# Altium PCB PCB1.PcbDoc
Units mm, origin at the board's own origin, x right, y up, seen from the top; angles counter-clockwise.
Board outline 48.01 x 41.4 mm, 2 copper layers (Top Layer, Bottom Layer); 19 components, 31 nets, 88 pads, 2 vias.
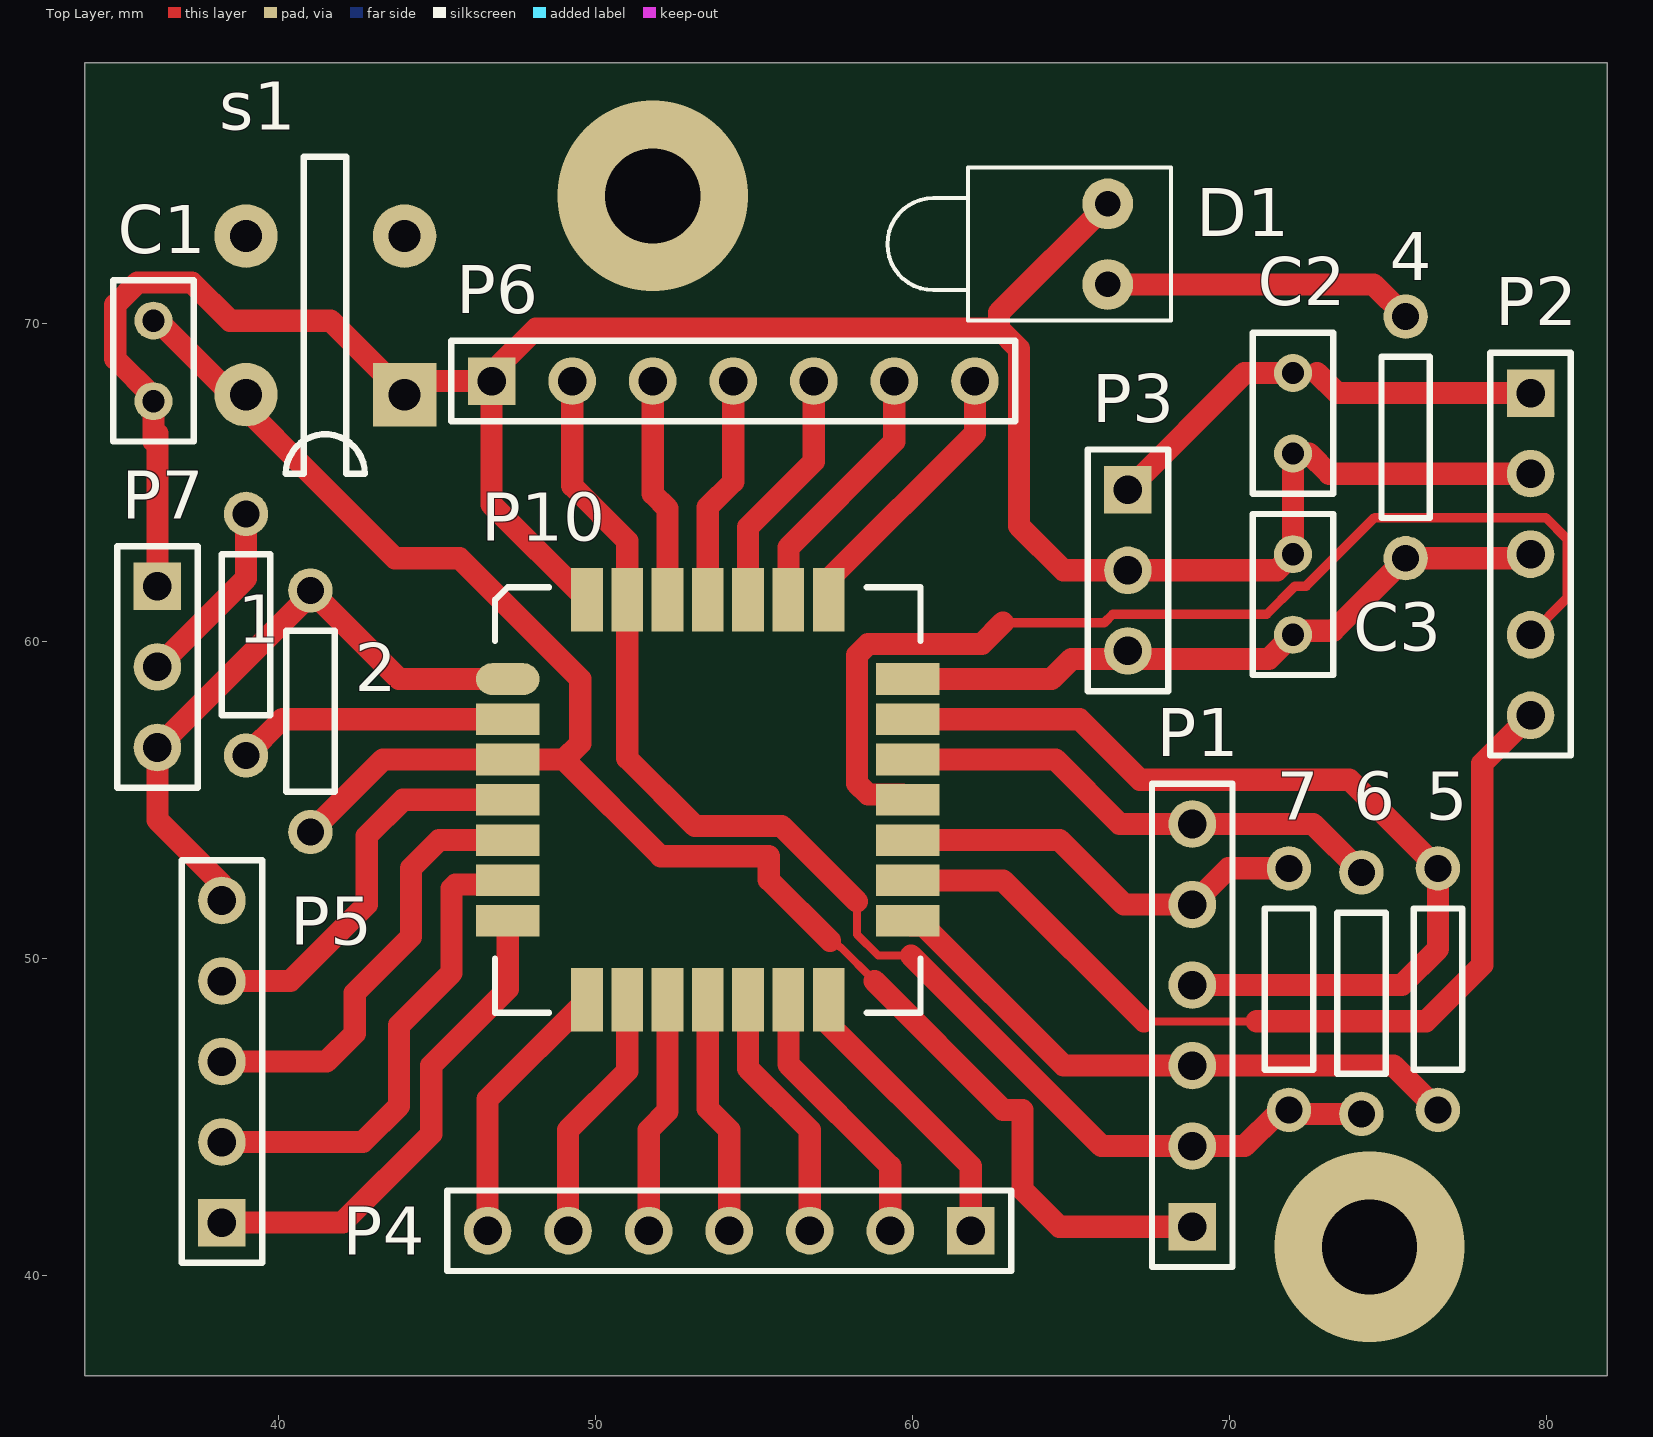
[diagram p0: Top Layer view]
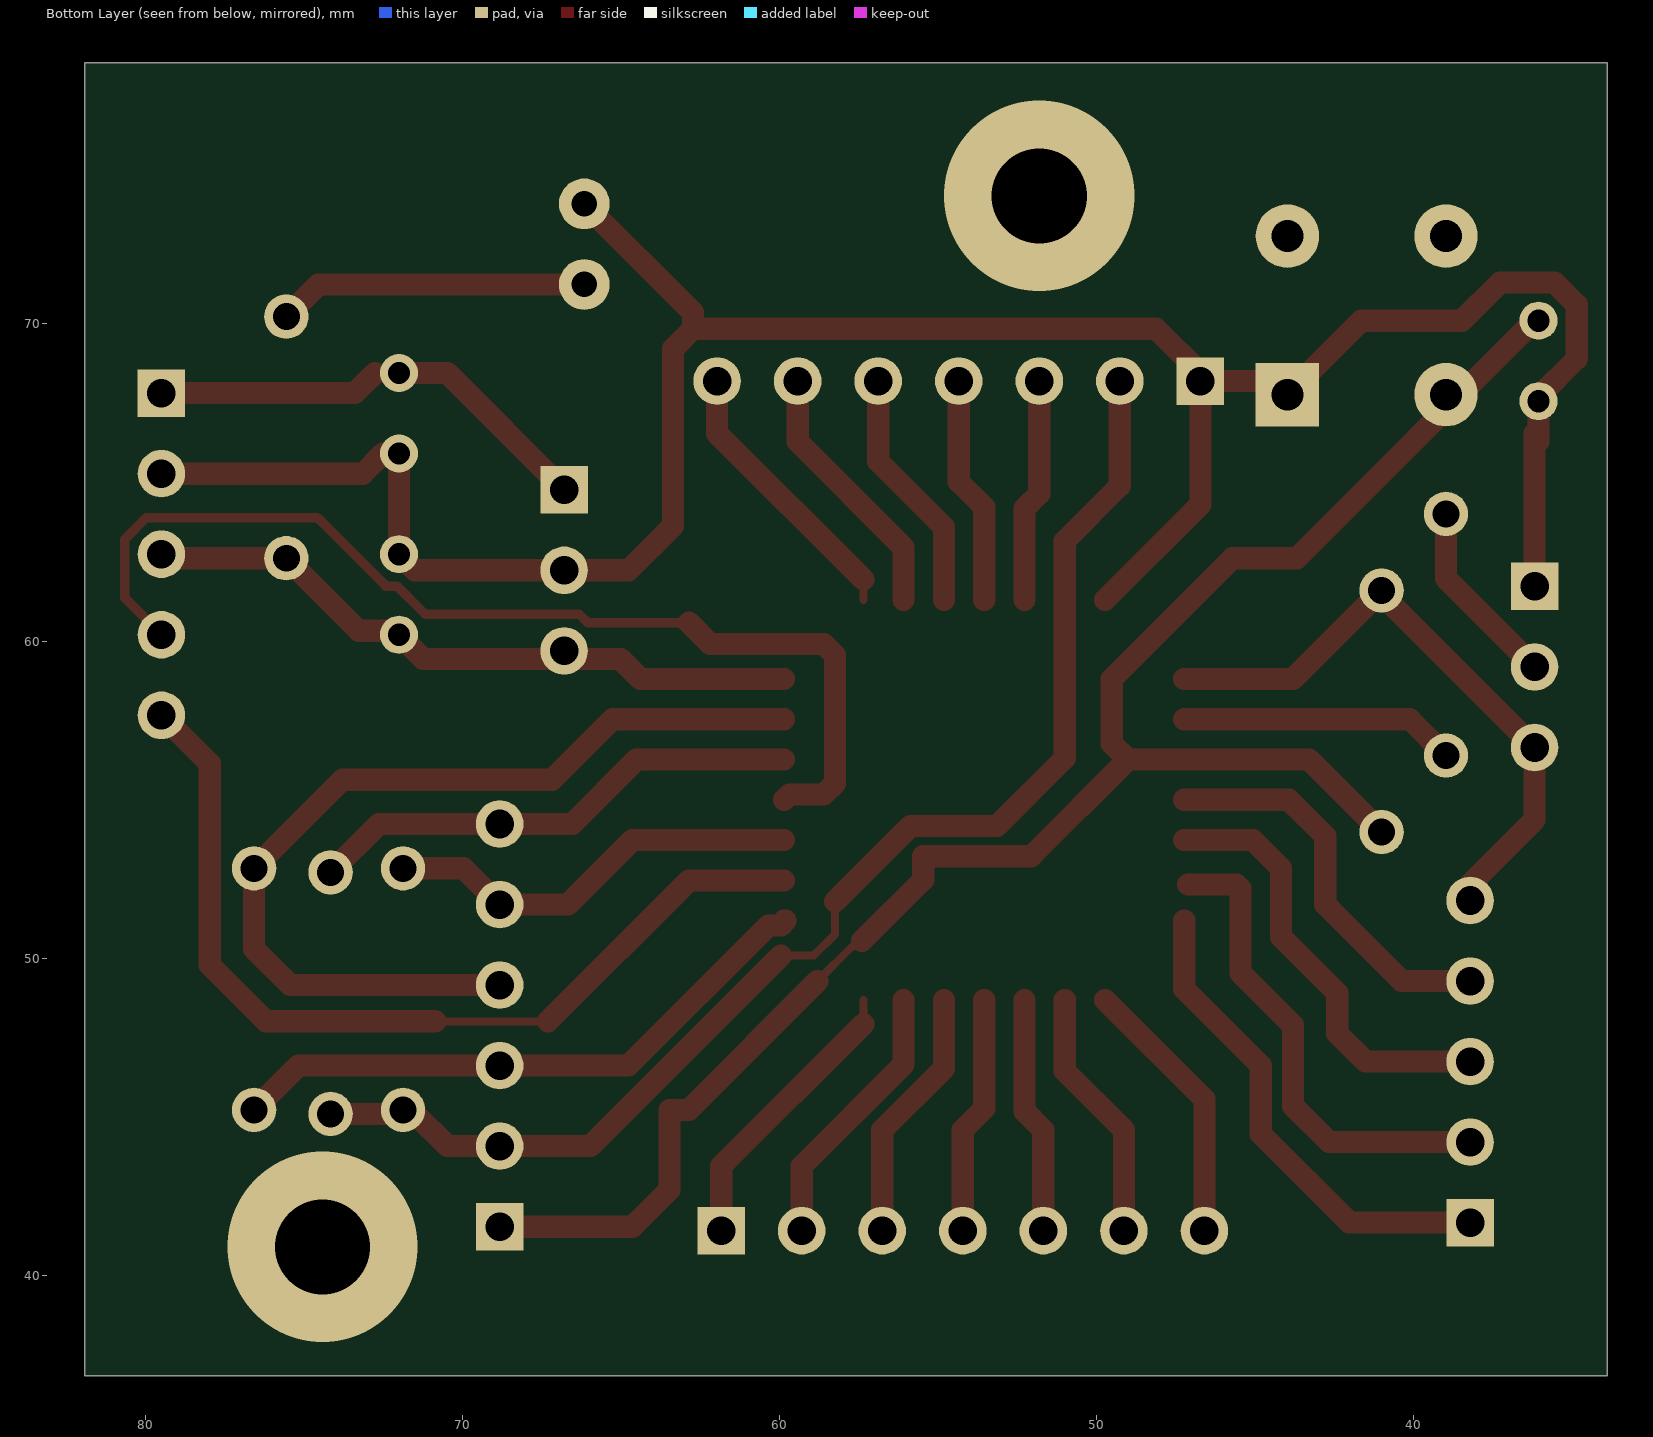
[diagram p1: Bottom Layer view, seen from below]

## Layer stack, top to bottom
Top Solder: solder mask 0.0102, Solder Resist, Dk 3.5
Top Layer: signal copper 0.0356
Dielectric 1: dielectric 0.32, FR-4, Dk 4.8
Bottom Layer: signal copper 0.0356
Bottom Solder: solder mask 0.0102, Solder Resist, Dk 3.5

## Board outline
33.909,36.83 81.915,36.83 81.915,78.232 33.909,78.232

## Design rules (kind name [scope] priority, off if disabled: settings)
Clearance [All] p1: gap=0.254
HoleSize [All] p1: absolutevalues=TRUE maxlimit=3.1 minlimit=0.025 maxpercent=80.000 minpercent=20.000
PolygonConnect [All] p1: connectstyle=Relief reliefconductorwidth=0.254 reliefentries=4 polygonreliefangle="90 Angle" airgapwidth=0.254
RoutingVias [All] p1: holewidth=0.711 width=1.27 viastyle="Through Hole" minholewidth=0.711 minwidth=1.27 maxholewidth=0.711 maxwidth=1.27
SolderMaskExpansion [All] p1: expansion=0.102
Width [All] p1: maxlimit=0.7 minlimit=0.254 preferedwidth=0.7
28 further rules are at their usual default settings.

## Components (designator, comment, footprint, x,y, rotation, side; value= is the part's Value field where it differs from the comment)
1 "Boot" AXIAL-0.3 38.989,60.198 r90 top
2 "switch" AXIAL-0.3 41.021,57.785 r90 top
4 "LED" AXIAL-0.3 75.565,66.421 r270 top
5 "pulldown" AXIAL-0.3 76.581,49.022 r270 top
6 "pullup" AXIAL-0.3 74.168,48.895 r90 top
7 "pullup" AXIAL-0.3 71.882,49.022 r270 top
C1 "Cap" RAD-0.1 36.068,68.834 r90 top
C2 "Cap" RAD-0.1 72.009,67.183 r270 top
C3 "Cap" RAD-0.1 72.009,61.468 r90 top
D1 "LED1" LED-1 66.167,72.517 r180 top
P1 "SWD" HDR1X6 68.834,41.529 r90 top
P2 "OUT3" HDR1X5 79.502,67.818 r270 top
P3 "powerRegulator" HDR1X3 66.802,64.77 r270 top
P4 "OUT2" HDR1X7 61.849,41.402 r180 top
P5 "OUT1" HDR1X5 38.227,41.656 r90 top
P6 "OUT4" HDR1X7 46.736,68.199 r0 top
P7 "BOOT" HDR1X3 36.195,61.722 r270 top
P10 "Component_1" "INEMO - duplicate3" 47.244,58.801 r0 top
s1 "Component_1" swt 46.101,70.739 r180 top

## Footprints (in the part's own frame and the unit in brackets; to place one, negate y for a bottom-side part, rotate by r counter-clockwise, add the part's x,y. Pads: shape width x height; smd on the part's side, far side on the other; paste and mask are expansions set on the pad)
AXIAL-0.3 [mm] "Axial Device, Thru-Hole; 2 Leads; 0.3 in Pin Spacing"
  round 1.4 hole 0.85: 1(-3.81,0) 2(3.81,0)
  silkscreen extent -2.54,-0.76 2.54,0.76
HDR1X3 [mm] "Connector; Header; 3 Position"
  rect 1.5x1.5 hole 0.9: 1(0,0)
  round 1.5 hole 0.9: 2(2.54,0) 3(5.08,0)
  silkscreen extent -1.27,-1.27 6.35,1.27
HDR1X5 [mm] "Connector; Header; 5 Position"
  rect 1.5x1.5 hole 0.9: 1(0,0)
  round 1.5 hole 0.9: 2(2.54,0) 3(5.08,0) 4(7.62,0) 5(10.16,0)
  silkscreen extent -1.27,-1.27 11.43,1.27
HDR1X6 [mm] "Connector; Header; 6 Position"
  rect 1.5x1.5 hole 0.9: 1(0,0)
  round 1.5 hole 0.9: 2(2.54,0) 3(5.08,0) 4(7.62,0) 5(10.16,0) 6(12.7,0)
  silkscreen extent -1.27,-1.27 13.97,1.27
HDR1X7 [mm] "Connector; Header; 7 Position"
  rect 1.5x1.5 hole 0.9: 1(0,0)
  round 1.5 hole 0.9: 2(2.54,0) 3(5.08,0) 4(7.62,0) 5(10.16,0) 6(12.7,0) 7(15.24,0)
  silkscreen extent -1.27,-1.27 16.51,1.27
"INEMO - duplicate3" [mm]
  oval 2x1 smd mask+0: 1(0,0)
  rect 2x1 smd mask+0: 2(0,-1.27) 3(0,-2.54) 4(0,-3.81) 5(0,-5.08) 6(0,-6.35) 7(0,-7.62) 15(12.62,-7.62) 16(12.62,-6.35) 17(12.62,-5.08) 18(12.62,-3.81) 19(12.62,-2.54) 20(12.62,-1.27) 21(12.62,0)
  rect 1x2 smd mask+0: 8(2.5,-10.12) 9(3.77,-10.12) 10(5.04,-10.12) 11(6.31,-10.12) 12(7.58,-10.12) 13(8.85,-10.12) 14(10.12,-10.12) 22(10.12,2.5) 23(8.85,2.5) 24(7.58,2.5) 25(6.31,2.5) 26(5.04,2.5) 27(3.77,2.5) 28(2.5,2.5)
  silkscreen extent -0.4,-10.52 13.02,2.9
LED-1 [mm] "LED; 2 Leads"
  round 1.6 hole 0.8: 1(0,1.27) 2(0,-1.27)
  silkscreen extent -2,-2.41 6.95,2.41
RAD-0.1 [mm] "Radial Cap, Thru-Hole; 2 Leads; 0.1 in Pin Spacing"
  round 1.2 hole 0.7: 1(-1.27,0) 2(1.27,0)
  silkscreen extent -2.54,-1.27 2.54,1.27
swt [mm]
  rect 2x2 hole 1: 1(2.112,2.968)
  round 2 hole 1: 2(2.112,-2.032) 3(7.112,-2.032) 4(7.112,2.968)
  silkscreen extent 3.36,-4.53 5.86,5.47

## Part data
1 2 4 5 6 7: library part Res1, "Resistor"
C1 C2 C3: "Capacitor"
D1: "Typical RED GaAs LED"
P1: library part "Header 6", "Header, 6-Pin"
P2 P5: library part "Header 5", "Header, 5-Pin"
P3 P7: library part "Header 3", "Header, 3-Pin"
P4 P6: library part "Header 7", "Header, 7-Pin"

## Via types
v1: diameter 6, hole 3, Top Layer to Bottom Layer, 2 vias

## Nets (pads, with @x,y where several pads share a name; then routed paths per layer and width w, separated by ;. In a path a pad name is that pad's centre, name@x,y a point inside that pad or via, vN(x,y) a via of type N, cw(c..) or ccw(c..) an arc to the next point about the centre after c; other vN are vias at no path point)
Net1_1: 1.1 P10.2 | length 8.7
  Top Layer w0.7: 1.1 40.132,57.531 P10.2
Net1_2: 1.2 P7.2 | length 6
  Top Layer w0.7: P7.2 38.989,61.976 1.2
Net2_1: 2.1 C1.2 P1.1 P10.3 s1.4 | length 57.3
  Top Layer w0.254: 57.728,50.355 58.808,49.276
  Top Layer w0.7: C1.2 36.195,70.104 43.688,62.611 45.72,62.611 49.53,58.801 49.53,56.769 49.022,56.261 ; 2.1 43.307,56.261 P10.3 49.022,56.261 ; 57.404,50.546 55.478,52.472 55.478,53.213 52.07,53.213 49.022,56.261 ; 58.808,49.276 62.872,45.212 63.479,45.212 63.479,42.693 64.643,41.529 P1.1
Net2_2: 2.2 P5.5 P7.3 P10.1 | length 20
  Top Layer w0.7: P5.5 38.227,52.324 36.195,54.356 P7.3 41.021,61.468 2.2 43.815,58.801 P10.1
Net4_1: 4.1 D1.1 | length 9.8
  Top Layer w0.7: D1.1 74.549,71.247 4.1
Net4_2: 4.2 C3.1 P2.3 P3.3 P10.21 | length 21.3
  Top Layer w0.7: P10.21 64.389,58.801 65.024,59.436 71.247,59.436 C3.1 72.136,60.325 73.279,60.325 4.2 79.375,62.611 P2.3
Net5_1: 5.1 P1.4 P10.20 | length 29.4
  Top Layer w0.7: P10.20 65.278,57.531 67.183,55.626 73.787,55.626 5.1 76.581,50.292 75.438,49.149 P1.4
Net5_2: 5.2 P1.3 P10.15 | length 19.3
  Top Layer w0.7: P10.15 59.817,51.181 59.967,51.031 60.358,51.031 64.78,46.609 P1.3 75.184,46.609 5.2
Net6_1: 6.1 7.2 P1.2 P6.2 P10.27 | length 41.9
  Top Layer w0.254: 58.26,51.78 58.26,50.746 58.929,50.077 59.963,50.077
  Top Layer w0.7: P6.2 49.276,64.897 51.014,63.159 P10.27 51.014,56.301 53.148,54.167 55.873,54.167 58.26,51.78 ; 59.963,50.077 65.971,44.069 P1.2 70.485,44.069 71.501,45.085 6.1
Net6_2: 6.2 P1.6 P10.19 | length 15.8
  Top Layer w0.7: P10.19 64.516,56.261 66.548,54.229 P1.6 72.644,54.229 6.2
Net7_1: 7.1 P1.5 P10.17 | length 13.1
  Top Layer w0.7: P10.17 64.643,53.721 66.675,51.689 P1.5 69.977,52.832 7.1@71.628,52.832
NetC1_1: C1.1 C2.2 C3.2 D1.2 P2.2 P3.2 P6.1 P7.1 P10.28 s1.1 | length 79.6
  Top Layer w0.7: 36.068,66.294 C1.1 ; C1.1@36.068,67.696 34.864,68.9 34.864,70.603 35.569,71.308 37.277,71.308 38.481,70.104 41.656,70.104 43.561,68.199 P6.1 ; P7.1 36.195,66.548 ; P10.28 46.736,64.309 P6.1 ; D1.2 62.738,70.358 62.738,69.85 ; C2.2 C3.2 71.501,62.23 P3.2 64.77,62.23 63.373,63.627 63.373,69.215 62.738,69.85 ; C2.2@72.517,65.913 73.152,65.278 P2.2 ; P6.1 46.736,68.453 48.133,69.85 62.738,69.85
NetC2_1: C2.1 P2.1 P3.1 | length 13.7
  Top Layer w0.7: P3.1 70.485,68.453 C2.1 ; 72.771,68.453 73.406,67.818 P2.1
NetP2_4: P2.4 P10.18 | length 33.8
  Top Layer w0.3: 62.865,60.579 66.059,60.579 66.324,60.844 71.181,60.844 72.071,61.734 72.425,61.734 74.583,63.892 79.98,63.892 80.656,63.216 80.656,61.352 P2.4
  Top Layer w0.7: P10.18 59.698,55.157 58.614,55.157 58.26,55.511 58.26,59.551 58.614,59.905 62.191,59.905 62.865,60.579
NetP2_5: P2.5 P10.16 | length 29.2
  Top Layer w0.254: 67.31,48.006 70.866,48.006
  Top Layer w0.7: P10.16 62.865,52.451 67.31,48.006 ; 70.866,48.006 76.2,48.006 77.978,49.784 77.978,56.134 P2.5
NetP4_1: P4.1 P10.14 | length 9.1
  Top Layer w0.254: P10.14@57.364,47.919 P10.14
  Top Layer w0.7: P10.14@57.364,47.919 61.849,43.434 P4.1
NetP4_2: P4.2 P10.13 | length 8.6
  Top Layer w0.7: P10.13 56.094,46.649 59.309,43.434 P4.2
NetP4_3: P4.3 P10.12 | length 8.1
  Top Layer w0.7: P10.12 54.824,46.522 56.769,44.577 P4.3
NetP4_4: P4.4 P10.11 | length 7.6
  Top Layer w0.7: P10.11 53.554,45.252 54.229,44.577 P4.4
NetP4_5: P4.5 P10.10 | length 7.5
  Top Layer w0.7: P4.5 51.689,44.577 52.284,45.172 P10.10
NetP4_6: P4.6 P10.9 | length 8.1
  Top Layer w0.7: P4.6 49.149,44.577 51.014,46.442 P10.9
NetP4_7: P4.7 P10.8 | length 8.6
  Top Layer w0.7: P4.7 46.609,45.546 P10.8
NetP5_1: P5.1 P10.7 | length 15.5
  Top Layer w0.7: P5.1 42.037,41.656 44.831,44.45 44.831,46.609 47.244,49.022 P10.7
NetP5_2: P5.2 P10.6 | length 15.5
  Top Layer w0.254: 45.466,52.197 45.593,52.324 ; P10.6@47.117,52.324 P10.6
  Top Layer w0.7: P5.2 42.672,44.196 43.815,45.339 43.815,47.879 45.466,49.53 45.466,52.197 ; 45.593,52.324 P10.6@47.117,52.324
NetP5_3: P5.3 P10.5 | length 13.9
  Top Layer w0.7: P5.3 41.529,46.736 42.418,47.625 42.418,48.895 44.196,50.673 44.196,52.832 45.085,53.721 P10.5
NetP5_4: P5.4 P10.4 | length 12.6
  Top Layer w0.7: P5.4 40.386,49.276 42.799,51.689 42.799,53.848 43.942,54.991 P10.4
NetP6_3: P6.3 P10.26 | length 7.1
  Top Layer w0.7: P6.3 51.816,64.643 52.284,64.175 P10.26
NetP6_4: P6.4 P10.25 | length 7.2
  Top Layer w0.7: P10.25 53.554,64.222 54.356,65.024 P6.4
NetP6_5: P6.5 P10.24 | length 7.8
  Top Layer w0.7: P10.24 54.824,63.587 56.896,65.659 P6.5
NetP6_6: P6.6 P10.23 | length 8.3
  Top Layer w0.7: P10.23 56.094,62.952 59.436,66.294 P6.6
NetP6_7: P6.7 P10.22 | length 8.8
  Top Layer w0.254: P10.22 P10.22@57.364,61.936
  Top Layer w0.7: P10.22@57.364,61.936 61.976,66.548 P6.7
pads on no net: s1.2 s1.3
copper on no net:
  other v1: 74.422,40.894 51.816,74.041